# EAGLE board below_water2 (EAGLE 6.3)
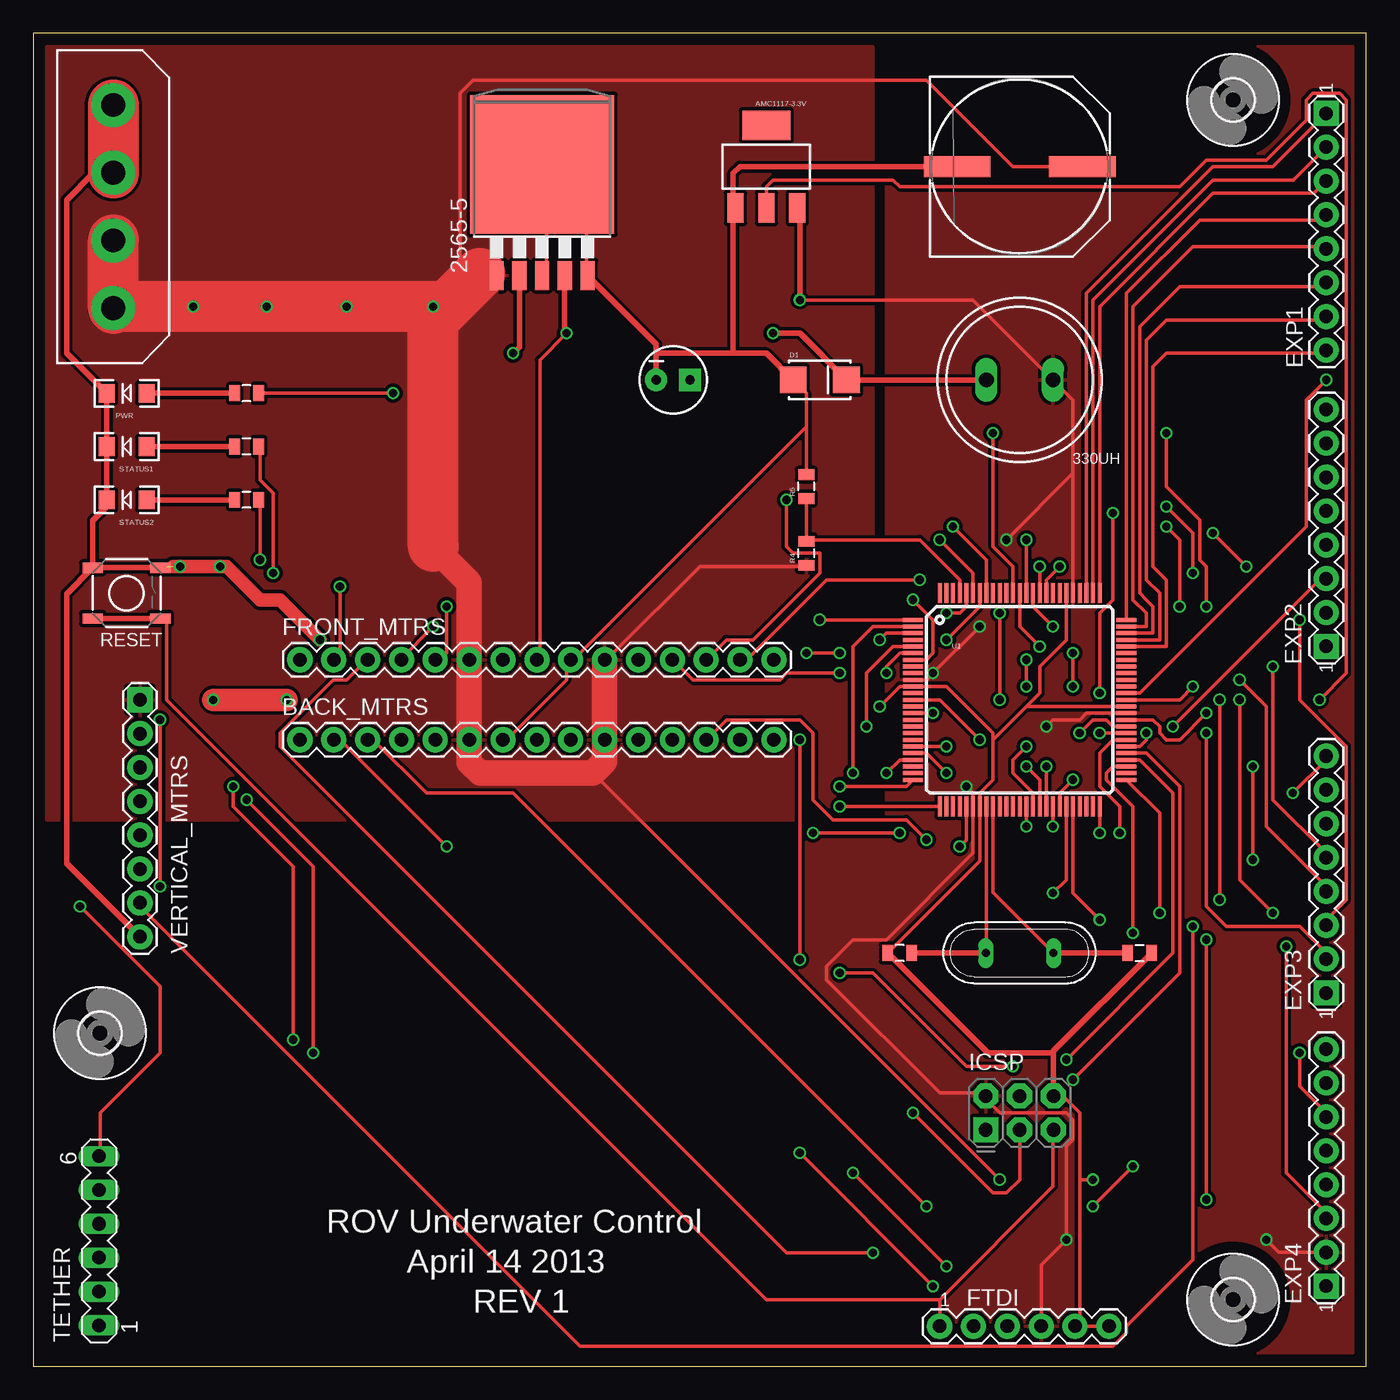
[diagram p0: board, top side]
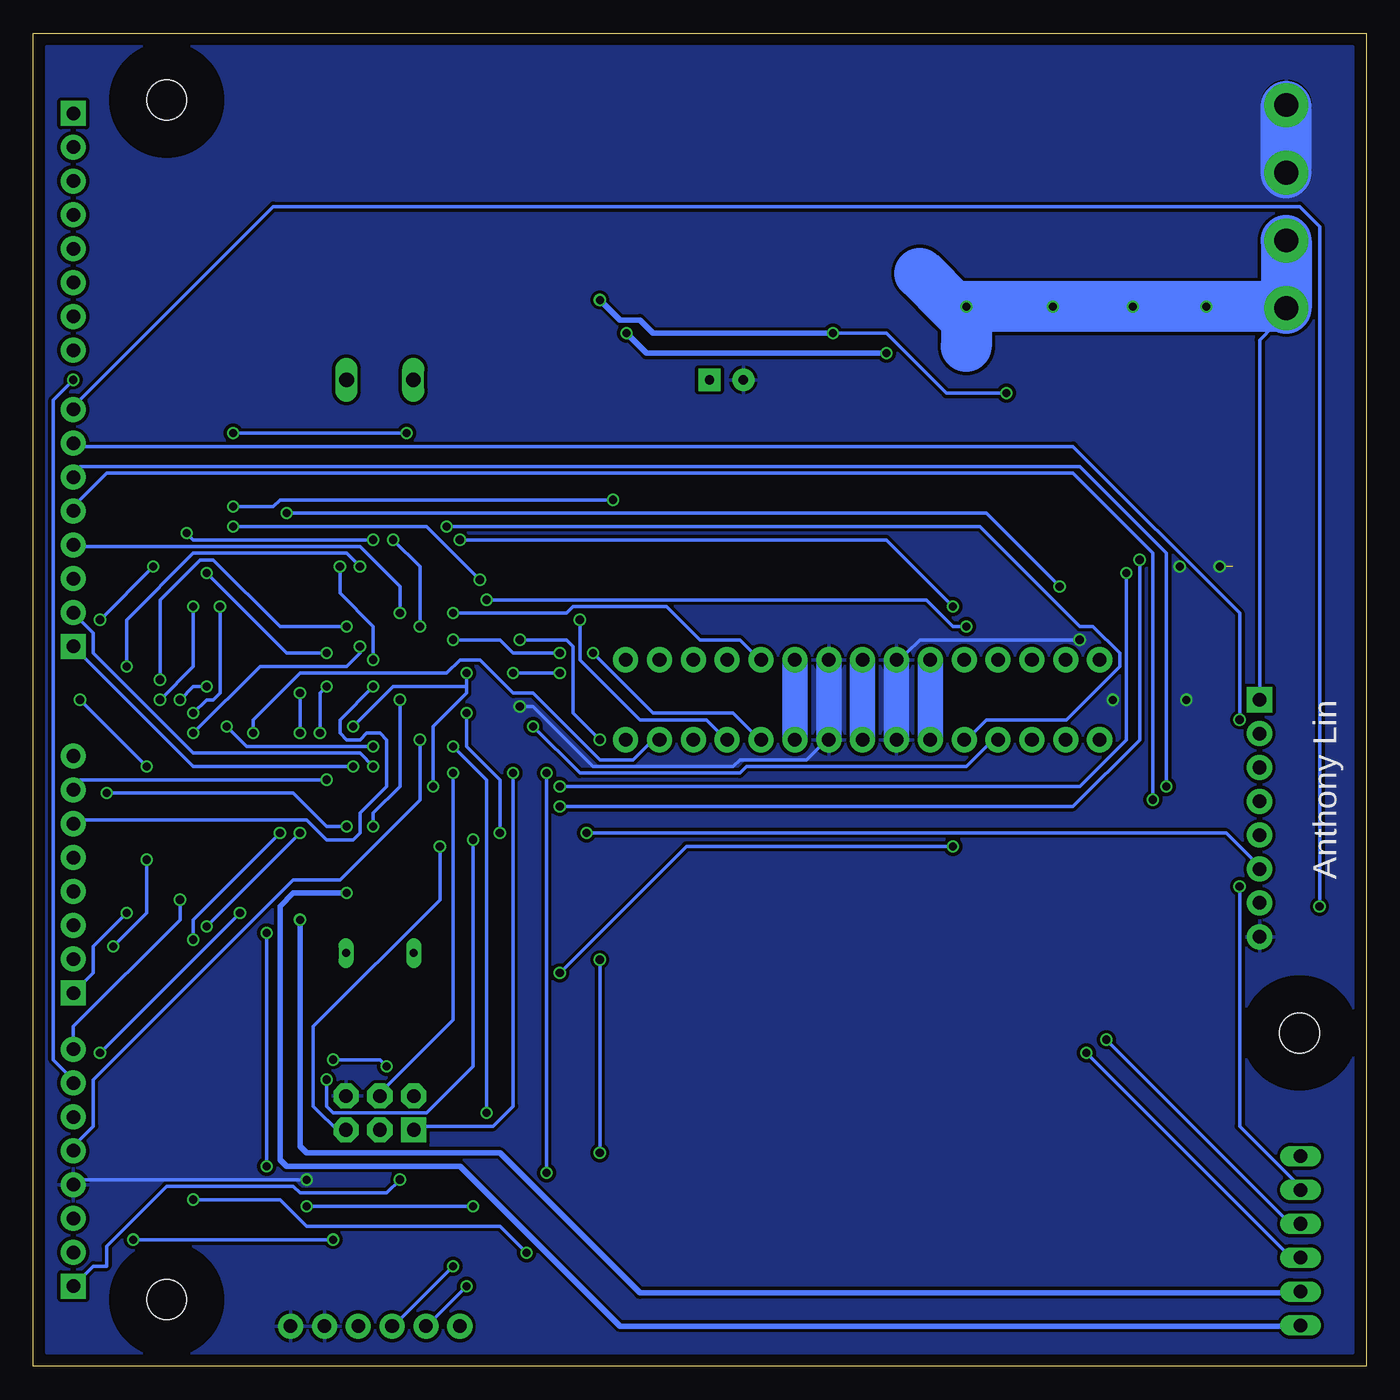
[diagram p1: board, bottom side, seen from below]

Size 100 x 100 mm. Coordinates in mm from the lower left corner, seen from the top.
Outline: 0,0 100,0 100,100 0,100 0,0
Copper layers (1*16): Top 0.035mm / dielectric 1.5mm / Bottom 0.035mm
Design rules "Fusion_eagle_rule_v1.1": minimum track width 6mil, minimum drill 12mil, track to track 6mil, track to pad 6mil, pad to pad 6mil, via to via 6mil, smd to smd 0mil, copper to edge 10mil, drill to drill 10mil, minimum pad ring 10mil, minimum via ring 6mil, stop-mask expansion 2mil, vias tented up to drill 100mil, thermal gap 10mil

## Footprints (pad centres in the part's own frame; a part is rotated, then mirrored left to right if it is on the bottom)
SD12_1000 = drill 1.1 long: 1 -2.5,0; 2 2.5,0
TO263-5 = smd 1.067 x 2.159: 1 -3.404,-5.791; 2 -1.702,-5.791; 3 0,-5.791; 4 1.702,-5.791; 5 3.404,-5.791 | smd 10.8 x 10.41: 6 0,2.54
SOT223 = smd 1.219 x 2.235: 1 -2.311,-3.099; 2 0,-3.099; 3 2.311,-3.099 | smd 3.6 x 2.2: 4 0,3.099
1X15 = drill 1.016 pad 1.88: 1 0,0; 2 2.54,0; 3 5.08,0; 4 7.62,0; 5 10.16,0; 6 12.7,0; 7 15.24,0; 8 17.78,0; 9 20.32,0; 10 22.86,0; 11 25.4,0; 12 27.94,0; 13 30.48,0; 14 33.02,0; 15 35.56,0
PANASONIC_H13 = smd 5 x 1.6: + 4.7,0; - -4.7,0
CPOL-RADIAL-10UF-25V = drill 0.7 pad 1.651 square: 1 1.27,0 | drill 0.7 pad 1.651: 2 -1.27,0
0805 = smd 0.8 x 1.2: 1 -0.9,0; 2 0.9,0
SMA-DIODE_ALT = smd 2 x 2: A -2,0; C 2,0
1X08 = drill 1.016 pad 1.88 square: 1 0,0 | drill 1.016 pad 1.88: 2 2.54,0; 3 5.08,0; 4 7.62,0; 5 10.16,0; 6 12.7,0; 7 15.24,0; 8 17.78,0
1X06 = drill 1.016 pad 1.88: 1 0,0; 2 2.54,0; 3 5.08,0; 4 7.62,0; 5 10.16,0; 6 12.7,0
3,0 = hole 3: 0,0
2X3-NS = drill 1.016 pad 1.88 square: 1 -2.54,-1.27 | drill 1.016 pad 1.88 octagon: 2 -2.54,1.27; 3 0,-1.27; 4 0,1.27; 5 2.54,-1.27; 6 2.54,1.27
COMPUTER-PERIPHERAL-POWER = drill 1.778 pad 3.302: 5V 7.62,0; 12V -7.62,0; GND 2.54,0; NC -2.54,0
LED-1206 = smd 1.2 x 1.4: A -1.5,0; C 1.5,0
QS = drill 0.61 long: 1 -2.54,0; 2 2.54,0
TACTILE_SWITCH_SMD = smd 1.524 x 0.762: 1 -2.54,1.905; 2 2.54,1.905; 3 -2.54,-1.905; 4 2.54,-1.905
MA06-1 = drill 1.016 long: 1 -6.35,0; 2 -3.81,0; 3 -1.27,0; 4 1.27,0; 5 3.81,0; 6 6.35,0
TQFP100 = smd 1.5 x 0.3: 1 -8,6; 2 -8,5.5; 3 -8,5; 4 -8,4.5; 5 -8,4; 6 -8,3.5; 7 -8,3; 8 -8,2.5; 9 -8,2; 10 -8,1.5; 11 -8,1; 12 -8,0.5; 13 -8,0; 14 -8,-0.5; 15 -8,-1; 16 -8,-1.5; 17 -8,-2; 18 -8,-2.5; 19 -8,-3; 20 -8,-3.5; 21 -8,-4; 22 -8,-4.5; 23 -8,-5; 24 -8,-5.5; 25 -8,-6; 51 8,-6; 52 8,-5.5; 53 8,-5; 54 8,-4.5; 55 8,-4; 56 8,-3.5; 57 8,-3; 58 8,-2.5; 59 8,-2; 60 8,-1.5; 61 8,-1; 62 8,-0.5; 63 8,0; 64 8,0.5; 65 8,1; 66 8,1.5; 67 8,2; 68 8,2.5; 69 8,3; 70 8,3.5; 71 8,4; 72 8,4.5; 73 8,5; 74 8,5.5; 75 8,6 | smd 0.3 x 1.5: 26 -6,-8; 27 -5.5,-8; 28 -5,-8; 29 -4.5,-8; 30 -4,-8; 31 -3.5,-8; 32 -3,-8; 33 -2.5,-8; 34 -2,-8; 35 -1.5,-8; 36 -1,-8; 37 -0.5,-8; 38 0,-8; 39 0.5,-8; 40 1,-8; 41 1.5,-8; 42 2,-8; 43 2.5,-8; 44 3,-8; 45 3.5,-8; 46 4,-8; 47 4.5,-8; 48 5,-8; 49 5.5,-8; 50 6,-8; 76 6,8; 77 5.5,8; 78 5,8; 79 4.5,8; 80 4,8; 81 3.5,8; 82 3,8; 83 2.5,8; 84 2,8; 85 1.5,8; 86 1,8; 87 0.5,8; 88 0,8; 89 -0.5,8; 90 -1,8; 91 -1.5,8; 92 -2,8; 93 -2.5,8; 94 -3,8; 95 -3.5,8; 96 -4,8; 97 -4.5,8; 98 -5,8; 99 -5.5,8; 100 -6,8

## Placement (x,y rotation side)
330UH  [SD12_1000]  74,74 0 top
2565-5  [TO263-5]  38.17,87.62 0 top
AMC1117-3.3V  [SOT223]  55,90 0 top
BACK_MTRS  M15  [1X15]  20,47 0 top
C1  100uf  [PANASONIC_H13]  74,90 0 top
C2  330uf  [CPOL-RADIAL-10UF-25V]  48,74 0 top
C3  22pf  [0805]  65,31 180 top
C4  22pf  [0805]  83,31 0 top
D1  1N5819  [SMA-DIODE_ALT]  59,74 0 top
EXP1  [1X08]  97,94 270 top
EXP2  [1X08]  97,54 90 top
EXP3  [1X08]  97,28 90 top
EXP4  [1X08]  97,6 90 top
FRONT_MTRS  M15  [1X15]  20,53 0 top
FTDI  [1X06]  68,3 0 top
H1  MOUNT-HOLE3.0  [3,0]  90,95 0 top
H2  MOUNT-HOLE3.0  [3,0]  90,5 0 top
H3  MOUNT-HOLE3.0  [3,0]  5,25 0 top
ICSP  AVR_SPI_PRG_6NS  [2X3-NS]  74,19 0 top
POWER  [COMPUTER-PERIPHERAL-POWER]  6,87 90 top
PWR  [LED-1206]  7,73 180 top
Q1  16mHz  [QS]  74,31 180 top
R1  1k  [0805]  16,65 180 top
R2  1k  [0805]  16,69 180 top
R3  1k  [0805]  16,73 180 top
R4  20k  [0805]  58,61 90 top
R5  12k  [0805]  58,66 90 top
S1  [TACTILE_SWITCH_SMD]  7,58 0 top
STATUS1  [LED-1206]  7,69 180 top
STATUS2  [LED-1206]  7,65 180 top
TETHER  [MA06-1]  4.93,9.41 90 top
U1  ATMEGA2560AU  [TQFP100]  74,50 0 top
VERTICAL_MTRS  [1X08]  8,50 270 top

## Library data of the parts
330UH = inductor-neosid; OC_FARNELL: unknown; OC_NEWARK: unknown
2565-5 = linear
AMC1117-3.3V = SparkFun-PowerIC
BACK_MTRS EXP1-EXP4 FRONT_MTRS FTDI ICSP POWER VERTICAL_MTRS = SparkFun-Connectors
C1-C4 = SparkFun-Capacitors
D1 = SparkFun-DiscreteSemi
H1-H3 = holes
PWR STATUS1 STATUS2 = SparkFun-LED
Q1 = special
R1-R5 = SparkFun-Resistors
S1 = SparkFun-Electromechanical; PROD_ID: SWCH-08247
TETHER = con-lstb; OC_FARNELL: unknown; OC_NEWARK: unknown
U1 = SparkFun-DigitalIC

## Nets
3.3V: AMC1117-3.3V.2 EXP4.3
5V: 330UH.2 2565-5.4 AMC1117-3.3V.3 BACK_MTRS.8 EXP4.2 FRONT_MTRS.8 FTDI.4 ICSP.2 R3.1 U1.10 U1.31 U1.61 U1.80
A0: R4.2 R5.1 U1.97
A1: FRONT_MTRS.11 U1.96
A2: FRONT_MTRS.5 U1.95
A3: BACK_MTRS.11 U1.94
A4: BACK_MTRS.5 U1.93
A5: U1.92
A6: U1.91
A7: U1.90
A8: EXP3.1 U1.89
A9: EXP3.2 U1.88
A10: EXP3.3 U1.87
A11: EXP3.4 U1.86
A12: EXP3.5 U1.85
A13: EXP3.6 U1.84
A14: U1.83
A15: U1.82
AGND: U1.99
AVCC: U1.100
CAM1: EXP2.5 TETHER.3
CAM2: EXP2.6 TETHER.4
CAM3: EXP2.7 TETHER.5
CAM_GND: EXP2.8 TETHER.6
D2: FRONT_MTRS.12 U1.6
D3: FRONT_MTRS.4 U1.7
D4: BACK_MTRS.12 U1.1
D5: BACK_MTRS.4 U1.5
D6: U1.15 VERTICAL_MTRS.6
D7: U1.16
D8: U1.17
D9: U1.18
D10: U1.23
D11: U1.24
D12: R2.1 U1.25
D13: R1.1 U1.26
D22: EXP1.1 U1.78
D23: EXP1.2 U1.77
D24: EXP1.3 U1.76
D25: EXP1.4 U1.75
D26: EXP1.5 U1.74
D27: EXP1.6 U1.73
D28: EXP1.7 U1.72
D29: EXP1.8 U1.71
D30: FRONT_MTRS.14 U1.60
D31: FRONT_MTRS.13 U1.59
D32: FRONT_MTRS.2 U1.58
D33: FRONT_MTRS.3 U1.57
D34: BACK_MTRS.14 U1.56
D35: BACK_MTRS.13 U1.55
D36: BACK_MTRS.2 U1.54
D37: BACK_MTRS.3 U1.53
D38: U1.50 VERTICAL_MTRS.7
D39: U1.70
D40: U1.52
D42: EXP2.1 U1.42
D43: EXP2.2 U1.41
D44: EXP2.3 U1.40
D45: EXP2.4 U1.39
D46: U1.38
D47: U1.37
D48: U1.36
D49: U1.35
D50: ICSP.1 U1.22
D51: ICSP.4 U1.21
D52: ICSP.3 U1.20
D53: U1.19
GND: 2565-5.3 2565-5.5 2565-5.6 AMC1117-3.3V.1 BACK_MTRS.7 BACK_MTRS.9 C1.- C2.2 C3.2 C4.2 D1.A EXP4.4 FRONT_MTRS.7 FRONT_MTRS.9 FTDI.5 FTDI.6 ICSP.6 POWER.5V POWER.GND PWR.C R5.2 S1.1 S1.2 STATUS1.C STATUS2.C U1.11 U1.32 U1.62 U1.81 VERTICAL_MTRS.8
N$1: 330UH.1 2565-5.2 D1.C
N$2: R1.2 STATUS2.A
N$3: R2.2 STATUS1.A
N$4: C3.1 Q1.2 U1.33
N$5: C4.1 Q1.1 U1.34
N$6: PWR.A R3.2
RESET: FTDI.1 ICSP.5 S1.3 S1.4 U1.30
RX: FTDI.3 U1.2
RX1: TETHER.1 U1.45
RX2: EXP4.6 U1.51
RX3: EXP4.8 U1.63
SCL: EXP3.8 U1.43
SDA: EXP3.7 U1.44
TX: FTDI.2 U1.3
TX1: TETHER.2 U1.46
TX2: EXP4.5 U1.13
TX3: EXP4.7 U1.64
VIN: 2565-5.1 BACK_MTRS.6 BACK_MTRS.10 C1.+ EXP4.1 FRONT_MTRS.6 FRONT_MTRS.10 POWER.12V POWER.NC R4.1 VERTICAL_MTRS.1

## Tracks (layer width: path | path; a pad name or v marks a point on that pad's centre or on a via)
3.3V  (via drill 0.61)
  Top 0.254: v96.5,50 98.5,52 98.5,95 98,95.5 96,95.5 95.5,95 95.5,93.5 92.5,90.5 88,90.5 86,88.5 65,88.5 64.5,89 55.5,89 55,88.5 AMC1117-3.3V.2 | v91.5,38 v91.5,45 | v94,31.5 94,14.5 97,11.5 EXP4.3
  Bottom 0.254: v91.5,45 v96.5,50 | v91.5,38 91.5,34 v94,31.5
5V  (via drill 0.6, 0.61)
  Top 0.254: EXP4.2 93.46,8.54 v92.5,9.5 | FTDI.4 75.62,7.62 v77.5,9.5 77.5,16.5 78,17 78,18.5 77.5,19 72.5,19 71.5,20 ICSP.2 71,20.5 68,20.5 59.5,29 59.5,30 61.5,32 64,32 70.5,38.5 U1.31 70.5,43 v70,43.5 | U1.10 67,51.5 v67.5,52 v71,55.5 | U1.61 79,49 78.5,48.5 76.5,48.5 v76,48 | 78,67 78,72.5 330UH.2 70.5,80 v57.5,80 | 78,67 U1.80 | v27,73 R3.1 | v40,77.5 38,75.5 38,53 FRONT_MTRS.8 | 78,67 v73,62
  Top 0.406: AMC1117-3.3V.3 57.5,86.71 v57.5,80 | v40,77.5 39.87,77.63 2565-5.4
  Bottom 0.254: v92.5,9.5 v77.5,9.5 | 67.5,51 67.5,50.5 70,48 v70,43.5 | 67.5,51 v67.5,52 | v76,48 73,51 67.5,51 | v27,73 31.5,73 36,77.5 v40,77.5 | v71,55.5 71,60 v73,62
  Bottom 0.406: v57.5,80 56,78.5 54.5,78.5 53.5,77.5 v40,77.5
  Bottom 1.93: FRONT_MTRS.8 BACK_MTRS.8
  pour Top (isolate 0.254): 1,40 64,40 64,99 99,99 99,1 1,1
A0
  Top 0.254: 58,62 58,65 R5.1 | 58,62 R4.2 58,62 | U1.97 69.5,59 66.5,62 58,62
A1  (via drill 0.61)
  Top 0.254: U1.96 70,57 69.5,56.5 v68.5,56.5
  Bottom 0.254: v68.5,56.5 60,56.5 59.5,57 52.5,57 50,54.5 47,54.5 45.5,53 FRONT_MTRS.11
A2  (via drill 0.61)
  Top 0.254: U1.95 70.5,59.5 v68,62 | v31,57 31,53.5 30.5,53 FRONT_MTRS.5
  Bottom 0.254: v68,62 36,62 v31,57
A3  (via drill 0.61)
  Top 0.254: U1.94 71,57 v68.5,54.5 | v58,53.5 v60.5,53.5
  Bottom 0.254: v68.5,54.5 65,54.5 64,53.5 v60.5,53.5 | v58,53.5 53.5,49 47.5,49 45.5,47 BACK_MTRS.11
A4  (via drill 0.61)
  Top 0.254: U1.93 71.5,60.5 v69,63
  Bottom 0.254: v69,63 29,63 21.5,55.5 20.5,55.5 18.5,53.5 18.5,52.5 22.5,48.5 28.5,48.5 30,47 BACK_MTRS.5
A8  (via drill 0.61)
  Top 0.254: U1.89 73.5,60 72,61.5 v72,70 | v85,70 85,66 87.5,63.5 87.5,60.5 88,60 v88,57 | v90.5,50 90.5,36.5 v93,34
  Bottom 0.254: v85,70 v72,70 | v88,57 88,52.5 v90.5,50 | v93,34 95.5,31.5 95.5,29.5 EXP3.1
A9  (via drill 0.61)
  Top 0.254: U1.88 74,55.5 v75.5,54 | v88,47.5 88,34.5 89.5,33 95,33 97,31 EXP3.2
  Bottom 0.254: v75.5,54 75.5,53.5 76.5,52.5 83,52.5 v88,47.5
A10  (via drill 0.61)
  Top 0.254: v74.5,62 U1.87 | v91,60 v88.5,62.5 | v95,56 95,50 98.5,46.5 98.5,35 97,33.5 EXP3.3
  Bottom 0.254: v74.5,62 88,62 v88.5,62.5 | v95,56 v91,60
A11  (via drill 0.61)
  Top 0.254: U1.86 75,57 v76.5,55.5 | v90.5,51.5 92.5,49.5 92.5,40.5 97,36 EXP3.4
  Bottom 0.254: v76.5,55.5 81.5,55.5 86.5,60.5 87.5,60.5 90.5,57.5 v90.5,51.5
A12  (via drill 0.61)
  Top 0.254: v75.5,60 U1.85 | v93,52.5 93,42.5 97,38.5 EXP3.5
  Bottom 0.254: v75.5,60 76.5,61 88,61 93,56 v93,52.5
A13  (via drill 0.61)
  Top 0.254: U1.84 76,59 v77,60 | v74.5,51 v74.5,53
  Bottom 0.254: v77,60 77,58 74.5,55.5 v74.5,53 | v74.5,51 77,48.5 77,47.5 76.5,47 75.5,47 75,47.5 74,47.5 73.5,47 73.5,43.5 75.5,41.5 75.5,40 76,39.5 78,39.5 79.5,41 97,41 EXP3.6
CAM1  (via drill 0.61)
  Top 0.254: v21,23.5 21,37.5 v16,42.5
  Bottom 0.254: v21,23.5 6,8.5 5,8.5 TETHER.3 | v16,42.5 16,61 22,67 94.5,67 97,64.5 EXP2.5
CAM2  (via drill 0.61)
  Top 0.254: v19.5,24.5 19.5,37.5 15,42 v15,43.5
  Bottom 0.254: v19.5,24.5 6,11 5,11 TETHER.4 | v15,43.5 15,61 21.5,67.5 96.5,67.5 97,67 EXP2.6
CAM3  (via drill 0.61)
  Top 0.254: v9.5,48.5 v9.5,36
  Bottom 0.254: v9.5,36 9.5,18 5,13.5 TETHER.5 | v9.5,48.5 9.5,56.5 22,69 97,69 EXP2.7
CAM_GND  (via drill 0.61)
  Top 0.254: v3.5,34.5 9.5,28.5 9.5,23.5 5,19 5,16 TETHER.6
  Bottom 0.254: v3.5,34.5 3.5,85.5 5,87 82,87 97,72 EXP2.8
D2  (via drill 0.61)
  Top 0.254: U1.6 65,53.5 64,52.5 v64,52 | v60.5,52 56.5,52 56,51.5 49.5,51.5 48,53 FRONT_MTRS.12
  Bottom 0.254: v60.5,52 v64,52
D3  (via drill 0.61)
  Top 0.254: U1.7 67,53 67.5,53.5 67.5,56 v66,57.5 | v30,55.5 27.5,53 FRONT_MTRS.4
  Bottom 0.254: v66,57.5 33,57.5 31,55.5 v30,55.5
D4  (via drill 0.61)
  Top 0.254: v59,56 U1.1
  Bottom 0.254: v59,56 59,53 54.5,48.5 49.5,48.5 48,47 BACK_MTRS.12
D5  (via drill 0.61)
  Top 0.254: U1.5 64.5,54 62.5,52 v62.5,48
  Bottom 0.254: v62.5,48 59,44.5 47,44.5 46.5,45 30,45 28,47 BACK_MTRS.4
D6  (via drill 0.61)
  Top 0.254: v67.5,49 U1.15 | v58.5,40 v65,40
  Bottom 0.254: v67.5,49 67.5,46.5 65,44 v65,40 | v58.5,40 10.5,40 8,37.5 VERTICAL_MTRS.6
D12  (via drill 0.61)
  Top 0.254: v18,59.5 18,65.5 17,66.5 17,69 R2.1 | v60.5,43.5 65.5,43.5 U1.25
  Bottom 0.254: v18,59.5 18,47 21.5,43.5 v60.5,43.5
D13  (via drill 0.61)
  Top 0.254: v17,60.5 17,65 R1.1 | U1.26 v60.5,42
  Bottom 0.254: v17,60.5 17,47 22,42 v60.5,42
D22
  Top 0.254: U1.78 79,80.5 88.5,90 93,90 EXP1.1
D23
  Top 0.254: U1.77 79.5,80 88.5,89 94.54,89 EXP1.2
D24
  Top 0.254: U1.76 80,79.5 88.5,88 96.08,88 EXP1.3
D25
  Top 0.254: U1.75 82,80.5 87.5,86 96.62,86 EXP1.4
D26
  Top 0.254: U1.74 83.5,55.5 83.5,56.5 82.5,57.5 82.5,79.5 87,84 96.84,84 EXP1.5
D27
  Top 0.254: U1.73 84,55 84,57 83.5,57.5 83,58 83,78 86,81 96.7,81 EXP1.6
D28
  Top 0.254: U1.72 84.5,54.5 84.5,58 83.5,59 83.5,77 85,78.5 96.74,78.5 EXP1.7
D29
  Top 0.254: U1.71 85,54 85,59 84,60 84,62.5 84,75 85,76 96.78,76 EXP1.8
D30  (via drill 0.61)
  Top 0.254: U1.60 84,48.5 84.5,48 84.5,47.5 85,47 86,47 v88,49 | v86,57 86,62 v85,63 | v66.5,59 59.5,59 53.5,53 FRONT_MTRS.14
  Bottom 0.254: v88,49 87,50 86.5,50 86,50.5 v86,57 | v85,63 70.5,63 v66.5,59
D31  (via drill 0.61)
  Top 0.254: U1.59 81,48 80.5,48.5 79.5,48.5 v78.5,47.5 | v78,53.5 v78,51 | v87,59.5 87,62.5 v85,64.5 | v56.5,65 56.5,61.5 57,61 59,61 59,59.5 54,54.5 52,54.5 50.5,53 FRONT_MTRS.13
  Bottom 0.254: v78.5,47.5 78.5,50.5 v78,51 | v78,53.5 81,53.5 v87,59.5 | v85,64.5 82,64.5 81.5,65 v56.5,65
D32  (via drill 0.61)
  Top 0.254: v80,47.5 U1.58 | v80,50.5 80,56.5 81,57.5 v81,64 | v23,58.5 23,53 FRONT_MTRS.2
  Bottom 0.254: v80,50.5 v80,47.5 | v81,64 28.5,64 v23,58.5
D33  (via drill 0.61)
  Top 0.254: U1.57 81,47 80,46 80,43.5 81.5,42 v81.5,40 | v88,12.5 v88,32 | v63,8.5 56.5,8.5 18.5,46.5 18.5,47.5 22.5,51.5 23.5,51.5 25,53 FRONT_MTRS.3
  Bottom 0.254: v81.5,40 88,33.5 v88,32 | v88,12.5 81.5,12.5 79.5,10.5 65,10.5 v63,8.5
D34  (via drill 0.61)
  Top 0.254: U1.56 83,46.5 83.5,47 v83.5,47.5
  Bottom 0.254: v83.5,47.5 83.5,48.5 80,52 69,52 68,53 66.5,53 64,50.5 62.5,50.5 57.5,45.5 55,45.5 53.5,47 BACK_MTRS.14
D35  (via drill 0.61)
  Top 0.254: U1.55 83.5,46 86,43.5 86,29.5 v78,21.5 | v67,39.5 65.5,41 60,41 58.5,42.5 58.5,47.5 57.5,48.5 52,48.5 50.5,47 BACK_MTRS.13
  Bottom 0.254: v78,21.5 78,19.5 77.5,19 70.5,19 67,22.5 v67,39.5
D36  (via drill 0.61)
  Top 0.254: U1.54 83,45.5 85.5,43 85.5,31 v77.5,23 | v73.5,22.5 70,22.5 63,29.5 v60.5,29.5 | v31,39 23,47 BACK_MTRS.2
  Bottom 0.254: v77.5,23 74,23 v73.5,22.5 | v60.5,29.5 51,39 v31,39
D37  (via drill 0.61)
  Top 0.254: U1.53 81,45 80.5,44.5 80.5,44 82.5,42 v82.5,32.5 | v79.5,12 v82.5,15 | v67,12 36,43 29.5,43 25.5,47 BACK_MTRS.3
  Bottom 0.254: v82.5,15 v82.5,32.5 | v67,12 v79.5,12
D38  (via drill 0.61)
  Top 0.254: v80,40 U1.50 | v87,33 87,8 82,3 82,2.5 81,1.5 41,1.5 8,34.5 VERTICAL_MTRS.7
  Bottom 0.254: v87,33 v80,40
D42  (via drill 0.61)
  Top 0.254: v76,45 U1.42
  Bottom 0.254: v76,45 88,45 EXP2.1
D43  (via drill 0.61)
  Top 0.254: U1.41 75.5,44 v74.5,45
  Bottom 0.254: v74.5,45 75.5,46 88,46 95.5,53.5 95.5,55 97,56.5 EXP2.2
D44  (via drill 0.61)
  Top 0.254: U1.40 75,43 73.5,44.5 73.5,45.5 v74.5,46.5 | v85.5,48 97,59.5 EXP2.3
  Bottom 0.254: v74.5,46.5 84,46.5 v85.5,48
D45  (via drill 0.61)
  Top 0.254: v74.5,40.5 U1.39 | v72.5,56.5 v72.5,50
  Bottom 0.254: v74.5,40.5 74.5,41.5 72.5,43.5 v72.5,50 | v72.5,56.5 72.5,58.5 75.5,61.5 97,61.5 EXP2.4
D50  (via drill 0.61)
  Top 0.254: U1.22 65,45.5 v64,44.5
  Bottom 0.254: v64,44.5 64,19.5 65.5,18 71,18 ICSP.1
D51  (via drill 0.61)
  Top 0.254: U1.21 67,46 v68.5,44.5
  Bottom 0.254: v68.5,44.5 68.5,26 74,20.5 ICSP.4
D52  (via drill 0.61)
  Top 0.254: v68.5,46.5 U1.20 | v66,19 72,13 73,13 74,14 74,17.5 ICSP.3
  Bottom 0.254: v68.5,46.5 66,44 v66,19
GND  (via drill 0.6, 0.61)  (1 unrouted)
  Top 0.254: C3.2 71,37.9 U1.32 71,43 72,44 72,47 | FTDI.6 FTDI.5 78.5,3.34 78.5,14 | 78.5,14 78.5,19 77.23,20.27 ICSP.6 | v79.5,14 78.5,14 | 72,47 72,47.5 68.5,51 U1.11 65,51 v63.5,49.5 | U1.81 77.5,54.5 75.5,52.5 75.5,50.5 74.5,49.5 | 72,47 74.5,49.5 | 74.5,49.5 U1.62 | BACK_MTRS.7 35.5,47 40,51.5 40,53 FRONT_MTRS.9 40.5,53 58,70.5 | 58,70.5 58,73 D1.A | 58,70.5 R5.2 | 38.5,86 38.5,90 2565-5.6 38.5,85.5 | 38.5,86 38.5,85.5 | 2565-5.3 38.5,82 38.5,85.5 | 2565-5.5 41.5,82 41.5,85.5 41,86 38.5,86 | 10,60 S1.2
  Top 0.406: STATUS2.C STATUS1.C PWR.C | STATUS2.C 5.5,64.5 4.46,63.46 S1.1 | PWR.C STATUS2.C | PWR.C 2.5,76 2.5,87.5 4.54,89.54 POWER.GND | S1.1 S1.2 | C4.2 76.54,23.64 76.54,23.5 | 76.54,23.5 ICSP.6 | C3.2 71.6,23.5 76.54,23.5 | 2565-5.5 46.73,76.67 46.73,76 | 46.73,76 C2.2 | D1.A 55,76 52.5,76 | 52.5,76 46.73,76 | 52.5,76 52.5,86.71 AMC1117-3.3V.1 52.5,87.09 52.5,89.5 53,90 C1.- 70.5,90 | VERTICAL_MTRS.8 2.5,37.72 2.5,57.95 S1.1
  Top 1.016: v21.5,54.5 18.5,57.5 17,57.5 14.5,60 v14,60 v11,60 10.5,60
  Top 1.676: v13.5,50 v19,50
  Top 3.81: POWER.5V POWER.GND
  Bottom 0.254: EXP4.4 96.62,14 v79.5,14 | v63.5,49.5 62.5,49.5 58,45 47.5,45 47,45.5 42,45.5 41,46.5 BACK_MTRS.9 | v21.5,54.5 33.5,54.5 34.5,53.5 FRONT_MTRS.7
  Bottom 1.93: FRONT_MTRS.9 BACK_MTRS.9 | BACK_MTRS.7 FRONT_MTRS.7
  Bottom 3.81: POWER.GND 6,94.5
  pour Bottom (isolate 0.254): 1,99 99,99 99,1 1,1
N$1  (via drill 0.6)
  Top 0.406: 330UH.1 D1.C 57.5,77.5 v55.5,77.5 | v36,76 36.47,76.47 2565-5.2
  Bottom 0.406: v55.5,77.5 54,76 v36,76
N$2
  Top 0.406: STATUS2.A R1.2
N$3
  Top 0.406: STATUS1.A R2.2
N$4
  Top 0.254: Q1.2 71.5,31.04 U1.33
  Top 0.406: C3.1 Q1.2
N$5
  Top 0.254: Q1.1 72,35.54 U1.34
  Top 0.406: C4.1 Q1.1
N$6
  Top 0.406: PWR.A R3.2
RESET  (via drill 0.61)
  Top 0.254: ICSP.5 76.5,17.69 76.5,13.5 68,5 | 68,5 FTDI.1 | U1.30 70,39.5 v69.5,39 | 68,5 55,5 10,50 10,56 S1.4
  Top 0.406: S1.3 S1.4
  Bottom 0.254: v69.5,39 69.5,35 79,25.5 79,19.5 77,17.5 ICSP.5
RX  (via drill 0.61)
  Top 0.254: U1.2 63,55.5 61.5,54 v61.5,44.5 | v68.5,7.5 v61.5,14.5
  Bottom 0.254: v61.5,14.5 v61.5,44.5 | v68.5,7.5 73,3 FTDI.3
RX1  (via drill 0.6)
  Top 0.254: v76.5,35.5 77.5,36.5 U1.45
  Bottom 0.406: TETHER.1 4.99,3 56,3 68,15 81,15 81.5,15.5 81.5,20 81.5,34.5 80.5,35.5 v76.5,35.5
RX2  (via drill 0.61)
  Top 0.254: U1.51 84.5,41.5 v84.5,34 | v95,23.5 95,21 97,19 EXP4.6
  Bottom 0.254: v95,23.5 v84.5,34
RX3  (via drill 0.61)
  Top 0.254: U1.63 86,50 v87,51 | v89,35 v89,50
  Bottom 0.254: v87,51 88,51 v89,50 | v89,35 89,33.5 97,25.5 97,24 EXP4.8
SCL  (via drill 0.61)
  Top 0.254: v76.5,40.5 U1.43 | v94.5,43 97,45.5 EXP3.8
  Bottom 0.254: v76.5,40.5 78,40.5 80.5,43 v94.5,43
SDA  (via drill 0.61)
  Top 0.254: U1.44 77,43 v78,44
  Bottom 0.254: v78,44 96.5,44 97,43.5 EXP3.7
TX  (via drill 0.61)
  Top 0.254: U1.3 64,55 v63.5,54.5 | v57.5,30.5 v57.5,47 | v67.5,6 v57.5,16
  Bottom 0.254: v63.5,54.5 60,54.5 59.5,54 59.5,49 v57.5,47 | v57.5,16 v57.5,30.5 | v67.5,6 70.5,3 FTDI.2
TX1  (via drill 0.6)
  Top 0.254: v80,33.5 78,35.5 U1.46
  Bottom 0.254: TETHER.2 5.03,5.5 5.5,5.5
  Bottom 0.406: 5.5,5.5 54.5,5.5 65,16 79.5,16 80,16.5 v80,33.5
TX2  (via drill 0.61)
  Top 0.254: U1.13 68,50 v71,47
  Bottom 0.254: v71,47 71,42.5 77,36.5 80.5,36.5 95.5,21.5 95.5,18 97,16.5 EXP4.5
TX3  (via drill 0.61)
  Top 0.254: U1.64 83,50.5 95.5,63 95.5,72.5 v97,74
  Bottom 0.254: v97,74 98.5,72.5 98.5,23 97,21.5 EXP4.7
VIN  (via drill 0.6, 0.61)
  Top 0.254: R4.1 58,60 50,60 43.5,53.5 FRONT_MTRS.10 | 2565-5.1 35,82 33.5,82 | 42,44.5 v72.5,14 | C1.+ 73.5,90 67,96.5 33,96.5 32,95.5 32,83 33.25,81.75 | 6,79.5 6.5,79.5
  Top 1.93: FRONT_MTRS.10 42.86,45.36 42,44.5 33.5,44.5 32.7,45.3 FRONT_MTRS.6 32.7,58.8 30,61.5
  Top 3.81: POWER.12V 6,79.5 6,84.5 | 30,61.5 30,78.5 31,79.5 | 33.5,82 33.25,81.75 31,79.5 | 31,79.5 v30,79.5 v23.5,79.5 v17.5,79.5 v12,79.5 6.5,79.5
  Bottom 0.254: EXP4.1 95.5,7.5 94.5,7.5 94.5,9 90,13.5 80.5,13.5 80,13 73.5,13 v72.5,14 | VERTICAL_MTRS.1 8,77 7,78 POWER.12V
  Bottom 1.93: FRONT_MTRS.10 BACK_MTRS.10 | BACK_MTRS.6 FRONT_MTRS.6
  Bottom 3.81: POWER.NC 6,79.5 | 6,79.5 POWER.12V | 6,79.5 v12,79.5 v17.5,79.5 v23.5,79.5 v30,79.5 31,79.5 | 31,79.5 33.5,82 | 31,79.5 30,78.5 30,76.5
  pour Top (isolate 0.254): 1,99 63,99 63,41 1,41

## Text on the board
tPlace: ROV Underwater Control | April 14 2013 | REV 1
bPlace: Anthony Lin
tNames: 1 | RESET | 1 | 1 | 1 | 1